# Allegro board Quadcopter.brd
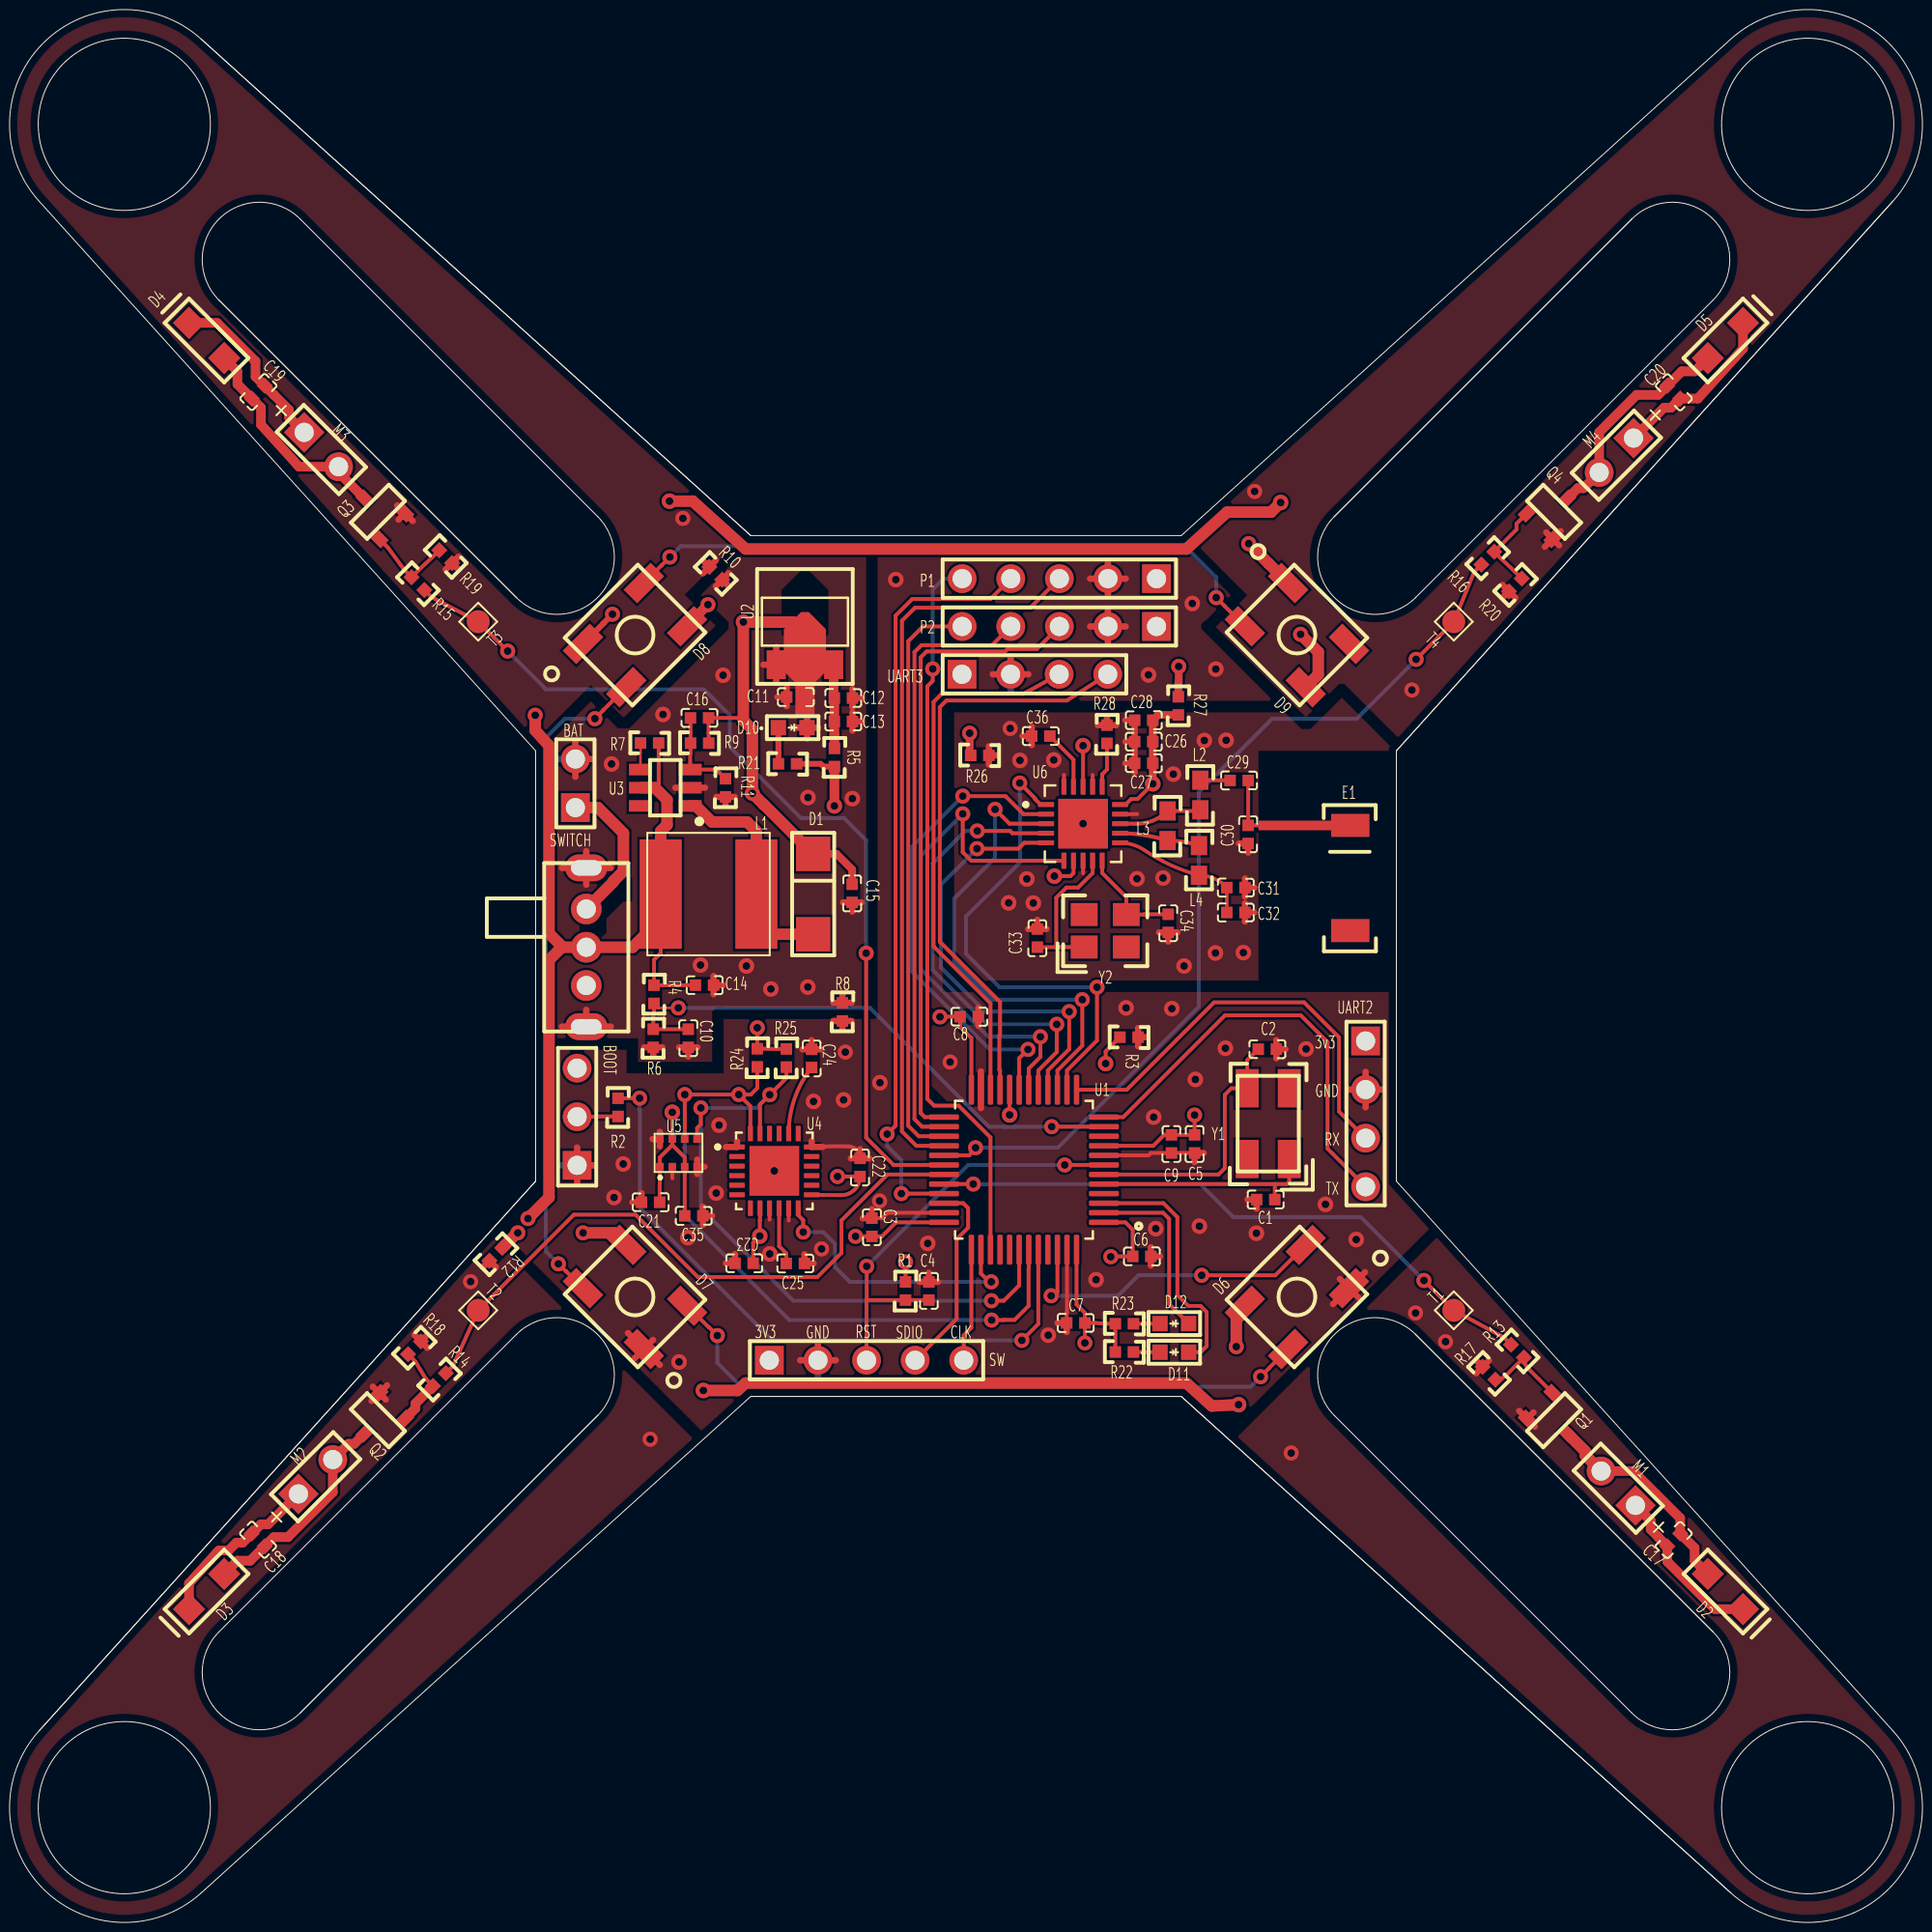
[diagram p0: board, top side]
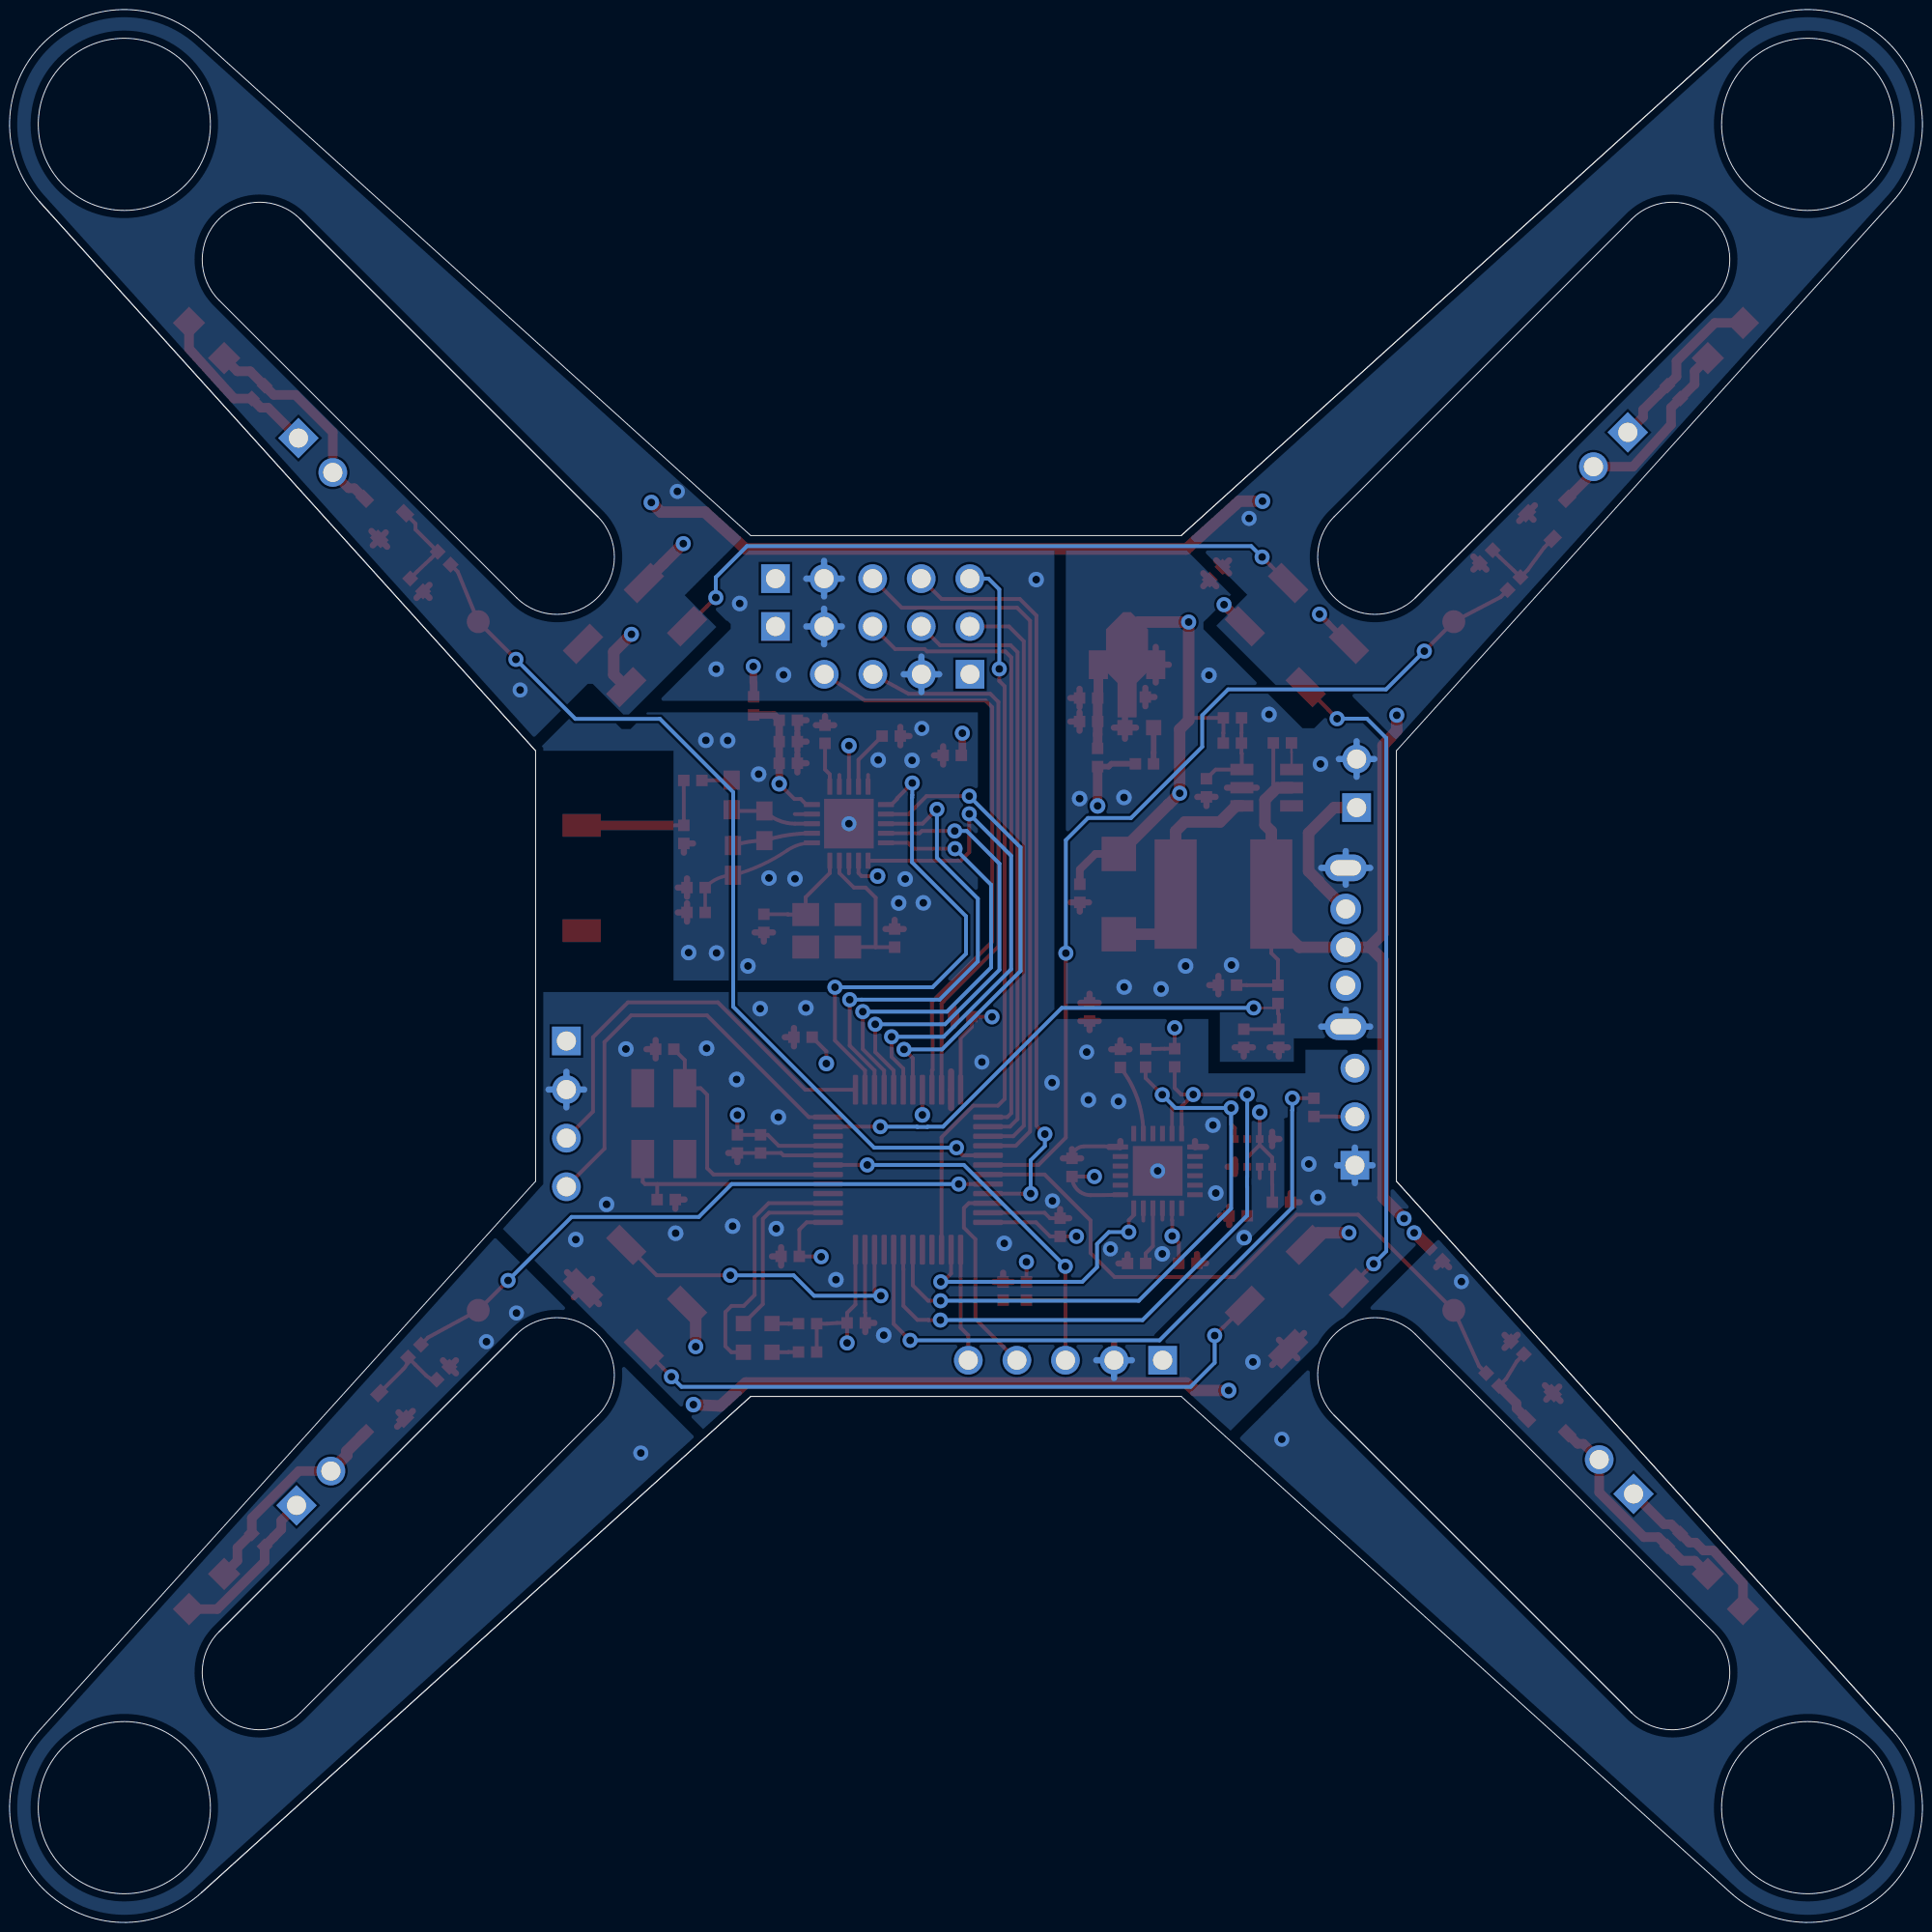
[diagram p1: board, bottom side, seen from below]

Outline 100 x 100 mm; copper layers: TOP, 2GND, 3POWER, BOTTOM. Coordinates in mm from the lower left corner of the outline.
Outline path: circle c6,94 r4.5 ; circle c6,6 r4.5 ; circle c94,94 r4.5 ; circle c94,6 r4.5 ; 10.02,98.45 arc(1.76,98.24) 1.55,89.98 27.5,61.25 ; 10.02,98.45 38.75,72.5 ; 10.02,98.45 38.75,72.5 ; 1.55,10.02 27.5,38.75 ; 1.55,10.02 arc(1.76,1.76) 10.02,1.55 38.75,27.5 ; 1.55,10.02 27.5,38.75 ; 27.5,38.75 27.5,61.25 ; 27.5,38.75 27.5,61.25 ; 38.75,72.5 61.25,72.5 89.98,98.45 arc(98.24,98.24) 98.45,89.98 ; 10.95,84.81 arc(10.95,89.05) 15.19,89.05 30.75,73.49 arc(30.75,69.25) 26.51,69.25 ; 10.95,84.81 26.51,69.25 ; 10.95,84.81 26.51,69.25 ; 15.19,10.95 arc(10.95,10.95) 10.95,15.19 26.51,30.75 arc(30.75,30.75) 30.75,26.51 ; 15.19,10.95 30.75,26.51 ; 15.19,10.95 30.75,26.51 ; 38.75,27.5 61.25,27.5 ; 38.75,27.5 61.25,27.5 ; 61.25,27.5 89.98,1.55 ; 61.25,27.5 89.98,1.55 ; 89.98,1.55 arc(98.24,1.76) 98.45,10.02 72.5,38.75 ; 69.25,73.49 84.81,89.05 ; 69.25,73.49 arc(69.25,69.25) 73.49,69.25 89.05,84.81 arc(89.05,89.05) 84.81,89.05 ; 69.25,73.49 84.81,89.05 ; 73.49,30.75 arc(69.25,30.75) 69.25,26.51 84.81,10.95 arc(89.05,10.95) 89.05,15.19 ; 73.49,30.75 89.05,15.19 ; 73.49,30.75 89.05,15.19 ; 72.5,61.25 72.5,38.75 ; 72.5,61.25 98.45,89.98 ; 72.5,61.25 72.5,38.75 ; 72.5,61.25 98.45,89.98

## Placement (name value [footprint] x y rotation side)
BAT  BAT  [HDR1X2]  29.58 59.55 90 top
BOOT  BOOT  [HDR1X3]  29.67 42.12 90 top
C1  20pF  [C0402]  65.67 37.79 0 top
C2  20pF  [C0402]  65.75 45.65 180 top
C3  0.1uF  [C0402]  45.08 36.34 270 top
C4  1uF  [C0402]  48.06 33.01 270 top
C5  1uF  [C0402]  61.95 40.7 90 top
C6  0.1uF  [C0402]  59.19 34.82 180 top
C7  0.1uF  [C0402]  55.74 31.34 0 top
C8  0.1uF  [C0402]  50.17 47.35 180 top
C9  0.1uF  [C0402]  60.74 40.7 90 top
C10  0.1uF  [C0402]  35.48 46.22 270 top
C11  1uF  [C0402]  41.1 64.06 180 top
C12  22uF  [C0402]  43.59 64.01 0 top
C13  0.1uF  [C0402]  43.59 62.78 0 top
C14  22uF  [C0402]  36.33 49 180 top
C15  22uF  [C0402]  44.05 53.8 90 top
C16  15pF  [C0402]  36.07 62.97 0 top
C17  4.7uF  [C0402]  87 20 45 top
C18  4.7uF  [C0402]  13 20 315 top
C19  4.7uF  [C0402]  13 80 225 top
C20  4.7uF  [C0402]  87 80 135 top
C21  0.1uF  [C0402]  33.51 37.65 180 top
C22  0.1uF  [C0402]  44.46 39.47 90 top
C23  10nF  [C0402]  38.4 34.46 180 top
C24  2.2nF  [C0402]  41.93 45.17 90 top
C25  0.1uF  [C0402]  41.08 34.45 0 top
C26  4.7uF  [C0402]  59.29 61.73 180 top
C27  0.1uF  [C0402]  59.29 60.6 180 top
C28  1nF  [C0402]  59.29 62.85 180 top
C29  1.5pF  [C0402]  64.28 59.7 0 top
C30  1pF  [C0402]  64.75 56.88 270 top
C31  2.2nF  [C0402]  64.11 54.1 0 top
C32  4.7pF  [C0402]  64.11 52.8 0 top
C33  10pF  [C0402]  53.73 51.46 90 top
C34  10pF  [C0402]  60.57 52.23 270 top
C35  0.1uF  [C0402]  35.77 36.94 0 top
C36  33nF  [C0402]  53.91 62.02 0 top
D1  SS14  [SMA]  42.01 53.76 270 top
D2  B5819WS  [SOD-323]  89.7 17.3 135 top
D3  B5819WS  [SOD-323]  10.3 17.3 45 top
D4  B5819WS  [SOD-323]  10.3 82.7 315 top
D5  B5819WS  [SOD-323]  89.7 82.7 225 top
D6  RGB  [5050]  67.3 32.7 45 top
D7  RGB  [5050]  32.7 32.7 315 top
D8  RGB  [5050]  32.7 67.3 225 top
D9  RGB  [5050]  67.3 67.3 135 top
D10  LED  [LED_0603]  40.94 62.46 0 top
D11  LED  [LED_0603]  60.89 29.81 0 top
D12  LED  [LED_0603]  60.89 31.3 0 top
E1  ANT_CA_C03  [ANT]  65.29 61.25 270 top
L1  1255AY-4R7M=P3/4.7uH_4A  [SMD6X6]  36.54 53.76 0 top
L2  3.9nH  [L_0603]  62.25 58.94 90 top
L3  8.2nH  [L_0603]  60.54 57.33 90 top
L4  2.7nH  [L_0603]  62.18 55.52 270 top
M1  M_720  [MOTOR]  84.1 22.7 135 top
M2  M_720  [MOTOR]  16 23.3 45 top
M3  M_720  [MOTOR]  16.3 77 315 top
M4  M_720  [MOTOR]  84 76.7 225 top
P1  Header_5P  [HDR1X5]  54.88 70.25 180 top
P2  Header_5P  [HDR1X5]  54.88 67.75 180 top
Q1  SI2302  [SOT-23-3]  80 27 225 top
Q2  SI2302  [SOT-23-3]  20 27 135 top
Q3  SI2302  [SOT-23-3]  20 73 45 top
Q4  SI2302  [SOT-23-3]  80 73 315 top
R1  10K  [R0402]  46.84 33.01 90 top
R2  10K  [R0402]  31.81 42.61 90 top
R3  10K  [R0402]  58.52 46.28 180 top
R4  100K,1%  [R0402]  33.69 48.52 270 top
R5  0R,1%  [R0402]  43.12 60.9 270 top
R6  100K,1%  [R0402]  33.65 46.22 270 top
R7  100K  [R0402]  33.46 61.66 180 top
R8  0R,1%  [R0402]  43.54 47.6 270 top
R9  73.2K,,1%  [R0402]  36.08 61.65 0 top
R10  0R,1%  [R0402]  36.92 70.53 135 top
R11  10K,1%  [R0402]  37.43 59.31 270 top
R12  0R,1%  [R0402]  25.42 34.93 225 top
R13  100R  [R0402]  78.83 29.87 315 top
R14  100R  [R0402]  22.47 28.38 225 top
R15  100R  [R0402]  21.35 69.99 135 top
R16  100R  [R0402]  77.28 71.32 45 top
R17  10K  [R0402]  77.34 28.71 135 top
R18  10K  [R0402]  21.17 30.04 45 top
R19  10K  [R0402]  22.8 71.4 315 top
R20  10K  [R0402]  78.72 69.92 225 top
R21  330  [R0402]  40.67 60.57 180 top
R22  330  [R0402]  58.28 29.82 0 top
R23  330  [R0402]  58.28 31.3 0 top
R24  4.7K  [R0402]  39.09 45.2 270 top
R25  4.7K  [R0402]  40.61 45.19 270 top
R26  0  [R0402]  50.72 61.01 0 top
R27  0  [R0402]  61.1 63.6 270 top
R28  22K  [R0402]  57.37 62.12 90 top
SW  SWD  [HDR1X5]  44.8 29.39 0 top
SWITCH  SK12D07VG3  [SWITCH]  30.15 50.98 270 top
T1  test  [TEST]  75.5 32 45 top
T2  test  [TEST]  24.5 32 315 top
T3  test  [TEST]  24.5 68 225 top
T4  test  [TEST]  75.5 68 135 top
U1  STM32F103C8T6  [QFP50P900X900X160-48N]  53.03 39.35 180 top
U2  HT7833  [SOT89]  41.58 67.75 0 top
U3  SX1308  [SOT23-6]  34.28 59.32 180 top
U4  MPU6050  [QFN50P400X400X90-24N]  39.98 39.29 0 top
U5  FBM320  [LGA-8]  34.97 40.23 90 top
U6  Si24R1  [QFN50P400X400X90-20N]  56.12 57.44 0 top
UART2  USART2  [HDR1X4]  70.89 42.29 270 top
UART3  USART3  [HDR1X4]  53.58 65.25 0 top
Y1  RH08000474_8M  [SMD5032_4P]  65.8 41.76 90 top
Y2  OSC_16M  [SMD3225_4P]  57.28 51.84 0 top

## Library data of the parts
BAT = 2P
BOOT = BOOT
C1-C36 = CAP NP
D1 = SS14
D2-D5 = B5819WS
D6-D9 = RGB
D10-D12 = LED
E1 = ANT
L1-L4 = INDUCTOR
M1-M4 = moter_0
P1 P2 = Header_5P
Q1-Q4 = SI2302
R1-R28 = R
SW = SWD
SWITCH = switch_3P
T1-T4 = test
U1 = STM32F103C8T6_2
U2 = HT7833_1
U3 = SX1308
U4 = MPU6050_0
U5 = FBM320
U6 = Si24R1
UART2 UART3 = USART
Y1 Y2 = OSC

## Footprints (pads in the part's own frame, mm; a bottom-side part is the same pattern mirrored in y, then rotated)
5050
  rect 2x1 smd: 1(2.25,-1.6) 2(2.25,1.6) 3(-2.25,1.6) 4(-2.25,-1.6)
ANT
  round 0.4 smd: 1(3.9,0.24)
C0402
  rect 0.6x0.6 smd: 1(-0.475,0) 2(0.475,0)
HDR1X2
  rect 1.5x1.5 hole 1: 1(-1.27,0)
  round 1.5 hole 1: 2(1.27,0)
HDR1X3
  rect 1.5x1.5 hole 1: 1(-2.54,0)
  round 1.5 hole 1: 2(0,0) 3(2.54,0)
HDR1X4
  rect 1.5x1.5 hole 1: 1(-3.79,0)
  round 1.5 hole 1: 2(-1.25,0) 3(1.29,0) 4(3.83,0)
HDR1X5
  rect 1.5x1.5 hole 1: 1(-5.08,0)
  round 1.5 hole 1: 2(-2.54,0) 3(0,0) 4(2.54,0) 5(5.08,0)
L_0603
  rect 1x0.85 smd: 1(-0.775,0) 2(0.775,0)
LED_0603
  rect 0.8x0.8 smd: 1(-0.75,0) 2(0.75,0)
LGA-8
  rect 0.4x0.4 smd: 1(0.725,0.975) 2(0.725,0.325) 3(0.725,-0.325) 4(0.725,-0.975) 5(-0.725,-0.975) 6(-0.725,-0.325) 7(-0.725,0.325) 8(-0.725,0.975)
MOTOR
  rect 1.5x1.5 hole 1: 1(-1.27,0)
  round 1.5 hole 1: 2(1.27,0)
QFN50P400X400X90-20N
  custom 0.84x0.26 smd: 1(-1.935,1) 2(-1.935,0.5) 3(-1.935,0) 4(-1.935,-0.5) 5(-1.935,-1) 11(1.935,-1) 12(1.935,-0.5) 13(1.935,0) 14(1.935,0.5) 15(1.935,1)
  custom 0.26x0.84 smd: 6(-1,-1.935) 7(-0.5,-1.935) 8(0,-1.935) 9(0.5,-1.935) 10(1,-1.935) 16(1,1.935) 17(0.5,1.935) 18(0,1.935) 19(-0.5,1.935) 20(-1,1.935)
  rect 2.6x2.6 smd: 21(0,0)
QFN50P400X400X90-24N
  custom 0.81x0.26 smd: 1(-1.95,1.25) 2(-1.95,0.75) 3(-1.95,0.25) 4(-1.95,-0.25) 5(-1.95,-0.75) 6(-1.95,-1.25) 13(1.95,-1.25) 14(1.95,-0.75) 15(1.95,-0.25) 16(1.95,0.25) 17(1.95,0.75) 18(1.95,1.25)
  custom 0.26x0.81 smd: 7(-1.25,-1.95) 8(-0.75,-1.95) 9(-0.25,-1.95) 10(0.25,-1.95) 11(0.75,-1.95) 12(1.25,-1.95) 19(1.25,1.95) 20(0.75,1.95) 21(0.25,1.95) 22(-0.25,1.95) 23(-0.75,1.95) 24(-1.25,1.95)
  rect 2.6x2.6 smd: 25(0,0)
QFP50P900X900X160-48N
  custom 1.56x0.28 smd: 1(-4.18,2.75) 2(-4.18,2.25) 3(-4.18,1.75) 4(-4.18,1.25) 5(-4.18,0.75) 6(-4.18,0.25) 7(-4.18,-0.25) 8(-4.18,-0.75) 9(-4.18,-1.25) 10(-4.18,-1.75) 11(-4.18,-2.25) 12(-4.18,-2.75) 25(4.18,-2.75) 26(4.18,-2.25) 27(4.18,-1.75) 28(4.18,-1.25) 29(4.18,-0.75) 30(4.18,-0.25) 31(4.18,0.25) 32(4.18,0.75) 33(4.18,1.25) 34(4.18,1.75) 35(4.18,2.25) 36(4.18,2.75)
  custom 0.28x1.56 smd: 13(-2.75,-4.18) 14(-2.25,-4.18) 15(-1.75,-4.18) 16(-1.25,-4.18) 17(-0.75,-4.18) 18(-0.25,-4.18) 19(0.25,-4.18) 20(0.75,-4.18) 21(1.25,-4.18) 22(1.75,-4.18) 23(2.25,-4.18) 24(2.75,-4.18) 37(2.75,4.18) 38(2.25,4.18) 39(1.75,4.18) 40(1.25,4.18) 41(0.75,4.18) 42(0.25,4.18) 43(-0.25,4.18) 44(-0.75,4.18) 45(-1.25,4.18) 46(-1.75,4.18) 47(-2.25,4.18) 48(-2.75,4.18)
R0402
  rect 0.6x0.6 smd: 1(-0.475,0) 2(0.475,0)
SMA
  rect 1.8x1.8 smd: 1(-2.1,0) 2(2.1,0)
SMD6X6
  rect 2.2x5.72 smd: 1(-2.5,0) 2(2.5,0)
SMD3225_4P
  rect 1.4x1.2 smd: 1(-1.1,-0.85) 2(1.1,-0.85) 3(1.1,0.85) 4(-1.1,0.85)
SMD5032_4P
  rect 2x1.2 smd: 1(-1.85,-1.1) 2(1.85,-1.1) 3(1.85,1.1) 4(-1.85,1.1)
SOD-323
  rect 1.2x1.2 smd: 1(-1.3,0) 2(1.3,0)
SOT23-6
  rect 1.2x0.6 smd: 1(-1.3,0.95) 2(-1.3,0) 3(-1.3,-0.95) 4(1.3,-0.95) 5(1.3,0) 6(1.3,0.95)
SOT89
  rect 1x1.5 smd: 1(-1.5,-2) 3(1.5,-2)
  custom 2.2x5.5 smd: 2(0,-2)
SOT-23-3
  rect 0.6x0.8 smd: 1(-0.95,0) 2(0.95,0) 3(0,2.02)
SWITCH
  round 1.6 hole 1: 1(-2,0) 2(0,0) 3(2,0)
  oval 1.4x2.2 hole 0.8x1.6: 4(4.15,0) 5(-4.15,0)
TEST
  round 1.2 smd: 1(0,0)

## Nets
AGND1: Q1.2(S) Q2.2(S) R12.2 R17.2 R18.2
AGND2: Q3.2(S) Q4.2(S) R10.2 R19.2 R20.2
DGND: BOOT.1 C1.1 C2.1 C3.1 C4.1 C5.1 C6.1 C7.1 C8.1 C9.1 C21.2 C22.2 C23.2 C24.2 C25.2 C35.2 D6.1(GND) D7.1(GND) D8.1(GND) D9.1(GND) P1.2 P2.2 R3.1 R8.2 R26.1 SW.2 U1.8(VSSA) U1.23(VSS#23) U1.35(VSS#35) U1.47(VSS#47) U4.1(CLKIN) U4.9(AD0) U4.11(FSYNC) U4.18(GND) U4.25(PAD) U5.1(GND1) U5.5(ADDR) U5.7(GND2) UART2.2 UART3.2
GND: BAT.2 C10.2 C11.2 C12.2 C13.2 C14.1 C15.1 D10.2 R6.2 R8.1 R10.1 R11.2 R12.1 SWITCH.4 SWITCH.5 U2.1(GND) U3.2(GND)
VBAT: C14.2 C17.1 C18.1 C19.1 C20.1 D2.1 D3.1 D4.1 D5.1 L1.1 M1.1 M2.1 M3.1 M4.1 R4.1 R7.1 SWITCH.2 U3.5(IN)
VBAT_DEV: C10.1 R4.2 R6.1 U1.11(PA1)
VBATIN: BAT.1 SWITCH.1
VCC3V3: BOOT.3 C3.2 C5.2 C6.2 C7.2 C8.2 C9.2 C21.1 C22.1 C23.1 C35.1 P1.1 P2.1 R1.2 R5.2 R21.1 R22.1 R23.1 R24.1 R25.1 R27.1 SW.1 U1.1(VBAT) U1.9(VDDA) U1.24(VDD1) U1.36(VDD2) U1.48(VDD3) U4.8(VLOGIC) U4.13(VDD) U5.2(CSB) U5.6(VDDIO) U5.8(VDD) UART2.1 UART3.1
VCC5V: C11.1 C15.2 C16.2 D1.1 D6.3(VCC) D7.3(VCC) D8.3(VCC) D9.3(VCC) R9.2 U2.2(IN)
BOOT0: R2.2 U1.44(BOOT0)
BOOT1: R3.2 U1.20(PB2)
INT: U1.38(PA15) U4.12(INT)
LED_BAT_LOW: D12.2 U1.2(PC13-TAMPER-RTC)
LED_RGB: D6.2(DI) U1.46(PB9)
LED_USER: D11.2 U1.3(PC14-OSC32_IN)
OSC_IN: C1.2 U1.5(PD0_OSC_IN) Y1.1
OSC_OUT: C2.2 U1.6(PD1_OSC_OUT) Y1.3
PA12: P1.4 U1.33(PA12)
PB3: P1.5 U1.39(PB3)
PB12: P2.3 U1.25(PB12)
PB13: P2.4 U1.26(PB13)
PB14: P2.5 U1.27(PB14)
PB15: P1.3 U1.28(PB15)
PWM1: R13.1 T1.1 U1.32(PA11)
PWM2: R14.1 T2.1 U1.31(PA10)
PWM3: R15.1 T3.1 U1.30(PA9)
PWM4: R16.1 T4.1 U1.29(PA8)
RF3V3: C26.1 C27.1 C28.1 R27.2 U6.7(VCC1) U6.15(VCC2) U6.18(VCC3)
RF_CE: U1.14(PA4) U6.1(CE)
RF_CSN: U1.19(PB1) U6.2(CSN)
RF_IRQ: U1.18(PB0) U6.6(IRQ)
RF_MISO: U1.16(PA6) U6.5(MISO)
RF_MOSI: U1.17(PA7) U6.4(MOSI)
RF_SCK: U1.15(PA5) U6.3(SCK)
RFGND: C26.2 C27.2 C28.2 C30.2 C31.2 C32.2 C33.2 C34.2 C36.1 R26.2 R28.2 U6.8(VSS1) U6.14(VSS2) U6.17(VSS3) U6.20(VSS4) U6.21(PAD)
RST: C4.2 R1.1 SW.3 U1.7(NRST)
SCL: R25.2 U1.42(PB6) U4.23(SCL) U5.4(SCL)
SDA: R24.2 U1.43(PB7) U4.24(SDA) U5.3(SDA)
SWCLK: SW.5 U1.37(PA14)
SWDIO: SW.4 U1.34(PA13)
USART2_RX: U1.13(PA3) UART2.3
USART2_TX: U1.12(PA2) UART2.4
USART3_RX: U1.22(PB11) UART3.3
USART3_TX: U1.21(PB10) UART3.4
N03876: BOOT.2 R2.1
N06551: R7.2 U3.4(EN)
N07087: D1.2 L1.2 U3.1(SW)
N07201: C16.1 R9.1 R11.1 U3.3(FB)
N08056: C12.1 C13.1 R5.1 U2.3(OUT)
N10193: Q1.1(G) R13.2 R17.1
N12066: D10.1 R21.2
N13204: D11.1 R22.2
N14590: C24.1 U4.20(CPOUT)
N14597: C25.1 U4.10(REGOUT)
N17425: C17.2 D2.2 M1.2 Q1.3(D)
N17724: Q2.1(G) R14.2 R18.1
N18193: Q3.1(G) R15.2 R19.1
N18558: Q4.1(G) R16.2 R20.1
N31030: C33.1 U6.9(XC2) Y2.1
N31048: C34.1 U6.10(XC1) Y2.3
N31678: L2.1 L3.2 U6.13(ANT2)
N31682: L3.1 L4.1 U6.12(ANT1)
N31733: C31.1 C32.1 L4.2 U6.11(VDD_PA)
N32120: C29.1 L2.2
N32150: C29.2 C30.1 E1.1
N42163: C18.2 D3.2 M2.2 Q2.3(D)
N42183: C19.2 D4.2 M3.2 Q3.3(D)
N42205: C20.2 D5.2 M4.2 Q4.3(D)
N44538: D12.1 R23.2
N45703: D7.4(DO) D8.2(DI)
N45721: D6.4(DO) D7.2(DI)
N45733: D8.4(DO) D9.2(DI)
N128503: C36.2 U6.19(DVDD)
N3065515: R28.1 U6.16(IREF)

Pads without a net: D9 4; SWITCH 3; U1 4 10 40 41 45; U3 6; U4 2 3 4 5 6 7 14 15 16 17 19 21 22; Y1 2 4; Y2 2 4

## Via types
v1: diameter 0.787, hole 0.406, TOP to BOTTOM, 79 vias
v2: diameter 0.813, hole 0.406, TOP to BOTTOM, 62 vias

## Routing (per net, layer and track width the routed paths; a pad name or vN(x,y) marks a point on that pad's centre or on a via; arc(x,y) is an arc through that point)
AGND1: length 43.6
  TOP w0.327: 76.67,28.71 R17.2 ; R17.2 76.67,29.38 ; R17.2 77.34,29.38 ; Q2.2 19.67,27.33 ; Q2.2 19.74,28.08 ; Q2.2 18.99,28.01 ; Q2.2 18.92,27.26 ; 78.92,26.74 Q1.2 ; Q1.2 79.67,26.67 ; Q1.2 79.74,25.92 ; 25.42,34.26 R12.2 24.75,34.26 ; 21.17,30.71 R18.2 ; R18.2 21.84,30.71 ; R18.2 21.84,30.04
  2GND w0.6: v1(67,24.54) 65.57,24.54 61.52,28.2 38.48,28.2 35.23,25.26 v1(33.49,25.26)
  vias: v1(24.1,33.5) v1(73.5,31.86) v1(75.07,30.36)
AGND2: length 39.8
  TOP w0.327: 20.26,74.08 Q3.2 ; Q3.2 21.08,73.26 ; Q3.2 20.33,73.33 ; 80.26,71.92 Q4.2 ; Q4.2 81.08,72.74 ; Q4.2 80.33,72.67 ; Q4.2 81.01,71.99 ; R10.2 36.92,71.2 ; R10.2 36.25,71.2 ; R10.2 36.25,70.53 ; R19.2 23.47,71.4 ; R19.2 22.8,70.73 ; R19.2 23.47,70.73 ; 78.05,69.92 R20.2 ; R20.2 78.72,69.25 ; R20.2 78.05,69.25
  2GND w0.6: v1(35.2,73.4) 36.71,73.4 38.48,71.8 62.08,71.8 v1(65.09,74.81)
  vias: v1(73.31,64.43)
DGND: length 137.2
  TOP w0.2: C5.1 C9.1 59.67,40.23 59.54,40.1 U1.8 ; 34.64,39.51 34.64,38.91 ; U4.9 39.73,36.74 ; U1.35 45.89,37.1 45.61,36.81 C3.1 ; U1.47 55.28,31.88 55.27,31.87 55.27,31.34 ; 40.73,36.69 U4.11 ; C22.2 arc(44.28,40.38) 43.85,40.57 arc(42.89,40.57) U4.18
  TOP w0.3: v1(31.52,68.39) 31.04,67.91 31.04,67.9 D8.1
  TOP w0.327: 38.03,40.85 U4.1 37.45,40.54 ; 51.4,65.25 UART3.2 ; UART3.2 52.33,66.18 ; UART3.2 53.26,65.25 ; D6.1 70.86,33.99 ; D6.1 70.5,32.68 ; D6.1 69.54,33.64 ; D6.1 69.19,32.33 ; 32.68,29.5 D7.1 ; D7.1 33.99,29.14 ; D7.1 33.64,30.46 ; D7.1 32.33,30.81 ; P2.2 58.35,67.75 ; P2.2 57.42,66.82 ; P2.2 57.42,68.68 ; P2.2 56.49,67.75 ; 43.06,47.12 R8.2 ; R8.2 43.54,46.65 ; R8.2 44.02,47.12 ; 48.06,33.48 48.06,33.96 ; 48.06,33.48 48.54,33.48 ; 48.06,33.48 47.58,33.48 ; 65.2,37.31 C1.1 64.72,37.79 ; UART2.2 70.89,44.47 ; UART2.2 71.82,43.54 ; UART2.2 70.89,42.61 ; UART2.2 69.96,43.54 ; 50.78,42.57 U1.23 50.78,44.49 ; 41.33,29.39 SW.2 ; SW.2 42.26,30.32 ; SW.2 43.19,29.39 ; C6.1 59.66,35.3 ; C6.1 59.66,34.34 ; C6.1 60.14,34.82 ; BOOT.1 30.6,39.58 ; BOOT.1 29.67,38.65 ; BOOT.1 29.67,40.51 ; 61.95,39.75 C5.1 62.43,40.23 ; 41.45,45.64 C24.2 ; C24.2 41.93,46.12 ; C24.2 42.41,45.64 ; 42.03,34.45 C25.2 41.55,34.93 ; C35.2 36.24,37.42 ; C35.2 36.24,36.46 ; C35.2 36.72,36.94 ; R3.1 59.47,46.28 ; R3.1 58.99,46.76 ; R3.1 58.99,45.8 ; 37.92,34.94 C23.2 37.45,34.46 ; C22.2 44.94,39.95 ; C22.2 43.98,39.95 ; C22.2 44.46,40.42 ; 66.22,45.17 C2.1 ; C2.1 66.22,46.13 ; C2.1 66.7,45.65 ; P1.2 57.42,71.18 ; P1.2 58.35,70.25 ; P1.2 56.49,70.25 ; P1.2 57.42,69.32 ; 35.95,39.13 U5.5 ; U5.5 36.32,39.51 ; U5.5 35.95,39.88 ; 45.08,37.29 C3.1 44.6,36.81 ; 33.62,40.95 U5.1 ; U5.1 34,40.58 ; U5.1 34,41.33 ; 50.65,46.87 C8.1 50.65,47.83 ; 33.04,38.13 C21.2 32.56,37.65 ; 41.93,40.85 U4.18 42.51,40.54 ; 55.27,30.86 55.27,31.34 54.79,31.34
  TOP w0.4: R26.1 50.19,61.06 v1(50.19,62.17)
  TOP w0.6: v1(64.78,72.08) 65.83,71.03 65.83,71.03 D9.1
  2GND w0.3: 45.71,71.2 36.84,71.2 34.03,68.39 v1(31.52,68.39) ; 62.81,70.11 62.8,70.11 62.8,70.09
  2GND w0.327: 56.49,67.75 P2.2 ; P2.2 57.42,66.82 ; P2.2 58.35,67.75 ; P2.2 57.42,68.68 ; 70.89,42.61 UART2.2 ; UART2.2 70.89,44.47 ; UART2.2 71.82,43.54 ; UART2.2 69.96,43.54 ; 52.33,64.32 UART3.2 ; UART3.2 51.4,65.25 ; UART3.2 53.26,65.25 ; UART3.2 52.33,66.18 ; 56.49,70.25 P1.2 ; P1.2 57.42,69.32 ; P1.2 58.35,70.25 ; P1.2 57.42,71.18 ; BOOT.1 30.6,39.58 ; BOOT.1 29.67,40.51 ; BOOT.1 29.67,38.65 ; SW.2 43.19,29.39 ; SW.2 42.26,30.32 ; SW.2 41.33,29.39
  2GND w0.4: 48.45,62.17 v1(50.19,62.17)
  2GND w0.6: 62.81,70.11 v1(64.78,72.08)
  BOTTOM w0.327: SW.2 43.19,29.39 ; SW.2 42.26,28.46 ; SW.2 41.33,29.39 ; BOOT.1 29.67,40.51 ; BOOT.1 30.6,39.58 ; BOOT.1 28.74,39.58 ; BOOT.1 29.67,38.65 ; P1.2 58.35,70.25 ; P1.2 56.49,70.25 ; P1.2 57.42,71.18 ; P1.2 57.42,69.32 ; P2.2 58.35,67.75 ; P2.2 57.42,66.82 ; P2.2 56.49,67.75 ; P2.2 57.42,68.68 ; 52.33,64.32 UART3.2 ; UART3.2 51.4,65.25 ; UART3.2 53.26,65.25 ; UART3.2 52.33,66.18 ; 69.96,43.54 UART2.2 ; UART2.2 70.89,44.47 ; UART2.2 70.89,42.61 ; UART2.2 71.82,43.54
  vias: v1(39.98,39.29) v1(42.45,35.21) v1(43.69,45.5) v1(45.48,37.72) v1(49.17,44.98) v2(31.6,37.9) v2(32.08,39.65) v2(35,29.3) v2(35.46,35.8) v2(36.94,38.13) v2(37.09,41.68) v2(39.74,34.95) v2(42.03,42.92) v2(43.6,43) v2(45.5,43.9) v2(46.33,70.2) v2(48,35.5) v2(54.3,30.7) v2(56.8,33.6) v2(58.37,47.81) v2(59.54,65.22) v2(59.81,42.1) v2(59.92,36.27) v2(60.76,47.77) v2(61.83,68.95) v2(61.99,44.07) v2(62.2,36.4) v2(63.06,65.52) v2(63.56,45.7) v2(65.18,36.03) v2(67.78,45.66) v2(68.79,37.54) v2(70.4,35.7)
GND: length 67.8
  TOP w0.327: 36.36,59.32 U3.2 34.8,59.32 ; 43.57,53.33 C15.1 ; C15.1 44.53,53.33 ; C15.1 44.05,52.85 ; SWITCH.4 31.43,46.83 ; SWITCH.4 28.87,46.83 ; SWITCH.4 30.15,47.71 ; 41.69,61.88 D10.2 ; D10.2 41.69,63.04 ; D10.2 42.27,62.46 ; D10.2 41.11,62.46 ; 36.8,48.52 C14.1 ; C14.1 36.8,49.48 ; C14.1 37.28,49 ; 36.95,58.84 R11.2 ; R11.2 37.43,58.36 ; R11.2 37.91,58.84 ; C13.2 44.54,62.78 ; C13.2 44.06,63.26 ; C13.2 44.06,62.3 ; 35.48,45.27 C10.2 ; C10.2 35,45.74 ; C10.2 35.96,45.74 ; C11.2 40.62,64.54 ; C11.2 40.15,64.06 ; C11.2 40.62,63.58 ; BAT.2 29.58,61.75 ; BAT.2 30.51,60.82 ; BAT.2 29.58,59.89 ; 39.4,65.75 U2.1 ; U2.1 40.08,64.82 ; U2.1 40.76,65.75 ; U2.1 40.08,66.68 ; R10.1 37.59,70.53 ; R10.1 37.59,69.86 ; R10.1 36.92,69.86 ; 33.17,45.74 R6.2 ; R6.2 33.65,45.27 ; R6.2 34.13,45.74 ; 44.06,63.53 C12.2 ; C12.2 44.54,64.01 ; C12.2 44.06,64.49 ; 30.15,54.25 SWITCH.5 ; SWITCH.5 31.43,55.13 ; SWITCH.5 28.87,55.13 ; SWITCH.5 30.15,56.01 ; 43.06,48.08 R8.1 ; R8.1 44.02,48.08 ; R8.1 43.54,48.55
  TOP w0.6: v1(26.57,36.05) 26.54,36.05 R12.1
  2GND w0.327: BAT.2 29.58,61.75 ; BAT.2 30.51,60.82 ; BAT.2 28.65,60.82 ; BAT.2 29.58,59.89 ; 28.87,55.13 SWITCH.5 ; SWITCH.5 31.43,55.13 ; SWITCH.5 30.15,54.25 ; SWITCH.5 30.15,56.01 ; 31.43,46.83 SWITCH.4 30.15,47.71
  2GND w0.6: SWITCH.4 29.75,46.83 28.2,45.28 28.2,38.48 27.92,38.17 27.92,37.14 27.92,36.46 27.44,35.98 26.76,35.98 26.69,36.05 v1(26.57,36.05)
  BOTTOM w0.327: BAT.2 29.58,61.75 ; BAT.2 30.51,60.82 ; BAT.2 28.65,60.82 ; BAT.2 29.58,59.89 ; 30.15,54.25 SWITCH.5 ; SWITCH.5 30.15,56.01 ; SWITCH.5 28.87,55.13 ; SWITCH.5 31.43,55.13 ; SWITCH.4 30.15,47.71 ; SWITCH.4 31.43,46.83 ; SWITCH.4 28.87,46.83
  vias: v2(31.47,60.56) v2(34.16,63.15) v2(36.12,50.05) v2(37.3,65.2) v2(38.52,50) v2(39.8,48.8) v2(41.74,58.81) v2(41.73,48.9) v2(44.06,58.75)
VBAT: length 162.9
  TOP w0.2: 33.73,59.32 33.94,59.52 33.94,61.66 ; C14.2 35.33,49 35.32,48.99 R4.1 33.69,50.32 34.04,50.67 34.04,52.45
  TOP w0.5: D4.1 10.85,83.62 12.86,81.62 12.86,80.81 C19.1 13.81,79.86 13.82,79.86 14.61,79.07 14.61,78.69 M3.1 ; M4.1 86.49,79.19 86.86,79.19 C20.1 88.26,79.66 90.62,82.28 D5.1 ; M1.1 85.79,21.01 85.79,20.55 86.19,20.15 86.19,20.14 C17.1 86.66,18.86 89.15,16.38 D2.1 ; D3.1 9.38,17.72 10.85,19.35 10.94,19.44 11.44,19.44 11.86,19.86 12.19,19.86 C18.1 13.14,20.81 13.51,20.81 M2.1
  TOP w0.6: v2(64.25,27.07) 62.85,27 61.52,28.2 38.48,28.2 38.05,27.81 v2(36.27,27.81) ; 28.92,50.98 28.87,50.98 28.2,50.31 28.2,37.9 v1(27.1,36.8) ; 28.92,50.98 28.2,51.7 28.2,61.52 27.48,62.32 v1(27.48,63.11) ; 28.92,50.98 SWITCH.2 32.57,50.98 34.04,52.45 L1.1 34.04,57.05 34.37,57.38 34.37,58.69 33.73,59.32 U3.5 ; v2(66.45,74.23) 65.95,73.73 63.66,73.73 61.52,71.8 38.48,71.8 35.97,74.07 35.71,74.3 v2(34.5,74.3)
  3POWER w0.2: 34.4,74.2 v2(34.5,74.3)
  3POWER w0.327: M3.1 16.06,78.55 ; M3.1 16.06,77.24 ; M3.1 14.75,77.24 ; M3.1 14.75,78.55 ; M1.1 85.65,21.15 ; M1.1 84.34,21.15 ; M1.1 84.34,22.46 ; M1.1 85.65,22.46 ; 14.45,21.75 M2.1 ; M2.1 14.45,23.06 ; M2.1 15.76,21.75 ; M2.1 15.76,23.06 ; M4.1 85.55,76.94 ; M4.1 85.55,78.25 ; M4.1 84.24,76.94 ; M4.1 84.24,78.25
VBAT_DEV: length 29.4
  TOP w0.127: R4.2 33.92,47.81 v1(34.96,47.81)
  TOP w0.2: v1(54.48,41.6) U1.11 ; C10.1 R6.1 33.65,47.48 33.69,47.52 R4.2
  BOTTOM w0.2: v1(54.48,41.6) 52.56,41.6 52.54,41.58 52.02,41.58 52,41.6 51.2,41.6 44.99,47.81 v1(34.96,47.81)
VBATIN: length 7.8
  TOP w0.6: BAT.1 30.76,58.28 32.09,56.95 32.09,54.96 31.56,54.43 31.56,54.39 SWITCH.1
VCC3V3: length 73.5
  TOP w0.2: R25.1 40.08,45.66 39.62,45.67 R24.1 v1(39.09,46.77) ; C7.2 56.74,31.34 57.28,31.3 R23.1 R22.1 ; C7.2 v1(56.22,30.3) ; C7.2 56.22,31.87 55.78,32.3 U1.48 ; 33.98,37.65 33.98,38.58 34,38.59 U5.8 34,39.99 34.64,40.64 ; v1(48.64,47.34) 48.65,47.35 C8.2 49.7,46.82 50.28,46.24 U1.24 ; v1(57.57,34.8) 57.59,34.82 C6.2 58.72,36.22 58.33,36.6 U1.1 ; U4.8 39.23,36.71 39.22,36.7 v2(39.22,35.88) 38.88,35.53 C23.1 ; U1.36 46.34,36.6 45.61,35.87 C3.2 v1(44.23,35.87) ; v1(43.28,38.99) C22.1 arc(44.18,38.31) 43.49,38.02 arc(42.71,38.02) U4.13 ; 34.64,40.64 v2(34.64,42.36) ; 34.64,40.64 35.3,39.99 U5.6 C35.1 ; U1.9 59.79,40.6 60.36,41.17 61.95,41.17 v1(61.95,42.21) ; 46.84,33.48 v1(46.84,34.53)
  TOP w0.3: R21.1 42.4,60.57 42.54,60.42 R5.2
  TOP w0.4: v1(61.12,65.66) 61.12,64.83 61.1,64.81 R27.1
  TOP w0.5: R5.2 v2(43.12,58.37)
  3POWER w0.327: SW.1 39.72,30.32 ; SW.1 40.65,29.39 ; SW.1 38.79,29.39 ; 70.89,45.15 UART2.1 ; UART2.1 71.82,46.08 ; UART2.1 69.96,46.08 ; UART2.1 70.89,47.01 ; P2.1 60.89,67.75 ; P2.1 59.96,68.68 ; P2.1 59.96,66.82 ; P2.1 59.03,67.75 ; 49.79,64.32 UART3.1 ; UART3.1 49.79,66.18 ; UART3.1 50.72,65.25 ; BOOT.3 30.6,44.66 ; BOOT.3 29.67,43.73 ; BOOT.3 29.67,45.59 ; P1.1 60.89,70.25 ; P1.1 59.96,69.32 ; P1.1 59.03,70.25 ; P1.1 59.96,71.18
VCC5V: length 143.4
  TOP w0.2: 38.36,62.84 38.23,62.97 C16.2 36.55,62.18 36.55,62.18 R9.2
  TOP w0.3: C11.1 41.58,64.72 41.58,64.72 U2.2
  TOP w0.4: D1.1 43.24,55.86 44.05,55.05 44.05,54.27
  TOP w0.5: D8.3 35.42,67.8 v1(36.51,68.89)
  TOP w0.6: v1(29.98,36.05) 31.61,36.05 D7.3 ; D6.3 64.13,31.79 v1(64.13,30.1) ; v1(36.51,68.89) 36.51,68.85 ; v1(67.49,67.34) 68.42,66.41 68.42,65.23 D9.3 ; D1.1 39.42,58.45 39.41,58.45 v1(38.83,59.03) 38.83,62.37 38.36,62.84 v1(38.36,67.98) 40.98,67.98 41.58,67.38 U2.2
  2GND w0.6: v1(36.51,68.89) 37.45,68.89 v1(38.36,67.98)
  3POWER w0.6: v1(64.13,30.1) 62.23,28.2 37.83,28.2 v1(29.98,36.05) 28.2,37.83 28.2,55.5 29,56.3 31.3,56.3 32.4,57.4 38.02,57.4 38.83,58.21 v1(38.83,59.03) ; v1(38.36,67.98) 38.36,69.76 40.4,71.8 63.03,71.8 v1(67.49,67.34)
BOOT0: length 34.8
  TOP w0.2: v1(52.92,30.43) 53.78,31.29 U1.44 ; R2.2 31.82,43.09 v1(32.94,43.09)
  BOTTOM w0.2: v1(52.92,30.43) 39.88,30.43 32.95,37.36 32.95,42.46 32.94,42.47 v1(32.94,43.09)
BOOT1: length 9.7
  TOP w0.2: R3.2 57.3,45.53 v2(57.3,44.9) ; U1.20 v2(52.28,42.22)
  3POWER w0.2: v2(52.28,42.22) 54.22,42.22 54.22,42.22 55.52,42.22 57.3,44 v2(57.3,44.9)
INT: length 14.9
  TOP w0.2: U4.12 41.23,36.97 41.49,36.71 v1(41.49,36.09) ; v1(51.32,33.49) 51.21,33.49 50.78,33.92 U1.38
  BOTTOM w0.2: v1(51.32,33.49) 43.92,33.49 43.15,34.26 43.15,35.47 42.53,36.09 v1(41.49,36.09)
LED_BAT_LOW: length 9.4
  TOP w0.2: U1.2 60.3,37.1 60.62,36.78 60.62,32.32 D12.2
LED_RGB: length 17
  TOP w0.2: v1(62.32,33.83) 66.17,33.83 D6.2 ; U1.46 54.78,32.96 54.58,32.76 v1(54.45,32.76)
  BOTTOM w0.2: v1(54.45,32.76) 57.94,32.76 59.01,33.83 v1(62.32,33.83)
LED_USER: length 13
  TOP w0.2: U1.3 60.32,37.6 61.05,36.87 61.05,32.8 61.62,32.23 62.26,32.23 62.58,31.91 62.58,30.12 62.27,29.81 D11.2
OSC_IN: length 11.7
  TOP w0.2: Y1.1 66.9,38.72 66.78,38.6 66.14,38.6 ; 66.14,38.6 U1.5 ; 66.14,38.6 66.14,38.59 C1.2
OSC_OUT: length 13.9
  TOP w0.2: U1.6 63.2,39.1 63.53,39.43 63.53,43.27 63.87,43.61 Y1.3 64.7,45.08 C2.2
PA12: length 39.8
  TOP w0.2: P1.4 51.28,69.19 47.19,69.19 46.32,68.32 46.32,41.66 v1(45.88,41.21) ; U1.33 47.02,38.1 47.01,38.09 46.63,38.09 v1(46.62,38.1)
  BOTTOM w0.2: v1(45.88,41.21) 45.88,40.59 46.62,39.84 v1(46.62,38.1)
PB3: length 38.5
  TOP w0.2: U1.39 51.28,41.04 49.62,42.7 48.33,42.7 47.98,43.05 47.98,64.62 48.26,64.9 v1(48.26,65.53)
  BOTTOM w0.2: v1(48.26,65.53) 48.26,69.69 48.82,70.25 P1.5
PB12: length 33
  TOP w0.2: P2.3 53.7,66.57 52.17,66.57 52.04,66.44 47.94,66.44 47.63,66.13 47.63,42.31 47.84,42.1 U1.25
PB13: length 31.7
  TOP w0.2: P2.4 51.36,66.77 47.67,66.77 47.31,66.41 47.31,41.99 47.7,41.6 U1.26
PB14: length 30.6
  TOP w0.2: U1.27 47.53,41.1 46.98,41.65 46.98,66.98 47.75,67.75 P2.5
PB15: length 38.4
  TOP w0.2: U1.28 47.4,40.6 46.65,41.35 46.65,68.05 47.33,68.73 53.36,68.73 P1.3
PWM1: length 32.9
  TOP w0.2: v1(50.38,38.6) U1.32 ; R13.1 78.12,30.58 T1.1 v1(73.94,33.56)
  BOTTOM w0.2: v1(50.38,38.6) 62.25,38.6 63.97,36.88 70.62,36.88 v1(73.94,33.56)
PWM2: length 34.7
  TOP w0.2: R14.1 23.18,29.09 T2.1 29.5,37 32.72,37 35.98,33.74 42.23,33.74 43.49,35 43.49,36.7 45.89,39.1 U1.31
PWM3: length 49.5
  TOP w0.2: R15.1 22.06,69.28 T3.1 v1(26.04,66.46) ; v1(44.78,50.67) 44.78,41.03 46.21,39.6 U1.30
  BOTTOM w0.2: v1(44.78,50.67) 44.78,56.58 43.62,57.74 41.37,57.74 37.65,61.46 37.65,63.11 36.3,64.46 28.04,64.46 v1(26.04,66.46)
PWM4: length 48.2
  TOP w0.2: v1(73.53,66.03) T4.1 76.57,70.61 R16.1 ; v1(50.5,40.5) 50.5,40.44 50.16,40.1 U1.29
  BOTTOM w0.2: v1(50.5,40.5) 54.8,40.5 62.17,47.87 62.17,59.09 66,62.92 70.42,62.92 v1(73.53,66.03)
RF3V3: length 10.8
  TOP w0.2: U6.18 v2(56.12,61.52) ; v2(59.77,59.52) 58.97,58.73 58.64,58.73 58.34,58.44 U6.15 ; 55.62,55.51 55.62,54.86 55.46,54.7 v2(54.62,54.7)
  TOP w0.4: R27.2 60.04,63.12 C28.1 C26.1 C27.1 v2(59.77,59.52)
RF_CE: length 25.6
  TOP w0.2: v1(56.85,48.89) 56.85,46.11 55.28,44.54 U1.14 ; 54.19,58.44 53.9,58.44 53.6,58.73 53.6,58.77 v1(52.81,59.56)
  BOTTOM w0.2: v1(56.85,48.89) 51.75,48.89 50,50.64 50,52.6 52.82,55.42 52.82,58.8 52.81,58.81 52.81,58.94 52.81,58.94 v1(52.81,59.56)
RF_CSN: length 25.1
  TOP w0.2: 54.19,57.94 53.01,57.94 52.07,58.88 v1(49.83,58.88) ; U1.19 52.78,45.18 v1(53.24,45.64)
  BOTTOM w0.2: v1(53.24,45.64) 51.25,45.64 47.15,49.74 47.15,56.2 v1(49.83,58.88)
RF_IRQ: length 27.2
  TOP w0.2: 55.12,55.51 52.37,55.51 52.37,55.5 51.85,55.5 51.85,55.51 50.27,55.51 49.83,55.95 v1(49.83,57.95) ; v1(53.89,46.3) 53.89,45.25 53.28,44.64 U1.18
  BOTTOM w0.2: v1(49.83,57.95) 47.64,55.76 47.64,49.83 51.17,46.3 v1(53.89,46.3)
RF_MISO: length 22.9
  TOP w0.2: U1.16 54.28,44.54 55.4,45.65 v1(55.4,47.61) ; v1(50.58,56.13) 52.74,56.13 53.04,56.44 54.19,56.44
  BOTTOM w0.2: v1(50.58,56.13) 48.69,54.25 48.69,49.92 51,47.61 v1(55.4,47.61)
RF_MOSI: length 23.7
  TOP w0.2: v1(54.74,46.95) 54.74,45.5 53.78,44.54 U1.17 ; v1(50.59,57.06) 52.31,57.06 52.43,56.94 54.19,56.94
  BOTTOM w0.2: v1(50.59,57.06) 49.96,57.06 48.25,55.35 48.25,49.8 51.1,46.95 v1(54.74,46.95)
RF_SCK: length 24.6
  TOP w0.2: 54.19,57.44 52.27,57.44 v1(51.52,58.19) ; U1.15 54.78,44.54 56.08,45.84 v1(56.08,48.24)
  BOTTOM w0.2: v1(51.52,58.19) 51.52,55.66 49.38,53.52 49.38,50.24 51.38,48.24 55.45,48.24 v1(56.08,48.24)
RFGND: length 17.6
  TOP w0.2: 56.12,55.51 56.12,54.84 ; U6.20 55.12,59.99 ; U6.14 58.95,57.94 ; 56.62,59.99 U6.17
  TOP w0.327: 58.34,60.6 C27.2 ; C27.2 58.81,61.08 ; C27.2 58.81,60.12 ; 60.57,51.28 C34.2 ; C34.2 61.05,51.76 ; C34.2 60.09,51.76 ; 64.27,56.41 C30.2 64.75,55.93 ; C31.2 65.06,54.1 ; C31.2 64.59,53.62 ; C31.2 64.59,54.58 ; C32.2 65.06,52.8 ; C32.2 64.59,52.32 ; C32.2 64.59,53.28 ; C33.2 53.73,52.41 ; C33.2 53.25,51.94 ; C33.2 54.21,51.94 ; 51.2,61.01 51.67,61.01 ; 51.2,61.01 51.2,61.49 ; 51.2,61.01 51.2,60.53 ; 56.89,62.59 R28.2 ; R28.2 57.37,63.07 ; R28.2 57.85,62.59 ; 58.81,61.25 C26.2 ; C26.2 58.34,61.73 ; C26.2 58.81,62.21 ; 58.81,62.37 C28.2 58.34,62.85 ; C36.1 53.44,62.5 ; C36.1 52.96,62.02 ; C36.1 53.44,61.54
  vias: v1(52.31,62.42) v1(56.12,57.44) v2(52.23,53.3) v2(52.82,60.75) v2(53.18,54.55) v2(53.52,53.29) v2(54.59,60.77) v2(58.94,54.56) v2(60.3,54.6) v2(60.84,60.03) v2(61.4,50) v2(62.46,61.79) v2(63.04,50.68) v2(63.6,61.8) v2(64.5,50.7)
RST: length 22.8
  TOP w0.2: U1.7 v1(55.16,39.6) ; 44.81,32.54 44.8,32.54 SW.3 ; 44.81,32.54 v1(44.81,34.3) ; 44.81,32.54 R1.1 C4.2
  BOTTOM w0.2: v1(44.81,34.3) 50.11,39.6 v1(55.16,39.6)
SCL: length 35.7
  TOP w0.2: R25.2 40.61,44.14 v1(39.74,43.27) 39.23,42.76 U4.23 ; U1.42 52.78,33.3 51.98,32.5 v1(51.33,32.5) ; v1(36.14,42.58) 36.14,41.73 35.95,41.53 U5.4
  BOTTOM w0.2: v1(39.74,43.27) 39.05,42.58 v1(36.14,42.58) 36.14,37.33 40.97,32.5 v1(51.33,32.5)
SDA: length 39.5
  TOP w0.2: 39.09,44.73 39.09,43.62 38.75,43.28 v1(38.12,43.28) ; v1(51.34,31.49) 51.97,31.49 51.98,31.5 52.54,31.5 53.27,32.23 53.27,34.15 53.28,34.16 U1.43 ; U5.3 35.3,40.96 v1(35.3,43.28) v1(38.12,43.28) ; U4.24 38.73,42.67 v1(38.12,43.28)
  BOTTOM w0.2: v1(35.3,43.28) 35.3,38.99 35.31,38.98 35.31,38.46 35.3,38.45 35.3,36.96 40.77,31.49 v1(51.34,31.49)
SWCLK: length 5.9
  TOP w0.2: SW.5 49.88,30.69 50.28,31.09 U1.37
SWDIO: length 10.5
  TOP w0.2: SW.4 49.51,31.55 49.51,35.72 50.11,36.32 50.11,37.35 49.86,37.6 U1.34
USART2_RX: length 22.2
  TOP w0.2: U1.13 58.4,43.53 62.97,48.1 67.67,48.1 69.5,46.27 69.5,42.39 UART2.3
USART2_TX: length 22.9
  TOP w0.2: UART2.4 68.9,40.45 68.9,46.02 67.5,47.42 63.54,47.42 58.22,42.1 U1.12
USART3_RX: length 28.5
  TOP w0.2: UART3.3 53,64.23 48.73,64.23 48.3,63.8 48.3,51.02 51.28,48.05 U1.22
USART3_TX: length 30.7
  TOP w0.2: U1.21 51.78,44.54 51.74,44.57 51.74,46.38 51.78,46.42 51.78,48.12 48.63,51.27 48.63,63.53 48.98,63.88 55.28,63.88 UART3.4
N03876: length 2.1
  TOP w0.2: R2.1 30.66,42.13 30.65,42.12 BOOT.2
N06551: length 1.4
  TOP w0.127: U3.4 32.98,61.16 32.98,61.17 R7.2
N07087: length 12
  TOP w0.6: U3.1 35.88,58.37 36.72,57.53 38.56,57.53 39.04,57.05 L1.2 39.04,52.26 39.64,51.66 D1.2
N07201: length 4.8
  TOP w0.2: R11.1 36.95,60.27 U3.3 35.58,61.1 35.6,61.12 R9.1 35.6,62.18 35.59,62.18 C16.1
N08056: length 4.4
  TOP w0.5: R5.1 43.12,62.1 43.12,62.1 C13.1 C12.1 43.08,64.05 U2.3
N10193: length 4.4
  TOP w0.2: Q1.1 79.42,28.93 arc(79.23,29.2) R13.2 78.79,29.16 78.24,28.61 arc(77.98,28.43) R17.1
N12066: length 1.9
  TOP w0.3: D10.1 40.19,61.15 40.2,61.15 R21.2
N13204: length 1.4
  TOP w0.2: 58.76,29.82 59.28,29.82 59.29,29.81 D11.1
N14590: length 3.7
  TOP w0.2: U4.20 arc(41.04,43.07) C24.1
N14597: length 3
  TOP w0.2: U4.10 40.23,35.35 40.61,34.98 C25.1
N17425: length 11.4
  TOP w0.5: M1.2 84.88,23.6 87.34,21.14 C17.2 88.09,19.58 88.09,18.91 D2.2
  TOP w0.6: Q1.3 82.37,24.63 82.37,24.43 M1.2
N17724: length 4.4
  TOP w0.2: R14.2 21.76,28.42 21.21,29.33 R18.1
  TOP w0.5: R14.2 21.22,27.13 21.22,26.88 Q2.1
N18193: length 4.6
  TOP w0.2: Q3.1 19.77,71.88 20.64,70.7 R15.2 21.39,70.7 22.09,71.36 R19.1
N18558: length 4.7
  TOP w0.2: R20.1 78.68,70.63 77.99,71.28 R16.2 78.78,72.82 78.78,73.12 Q4.1
N31030: length 8.1
  TOP w0.2: Y2.1 54.72,50.99 ; 54.72,50.99 54.72,53.57 55.25,54.1 55.86,54.1 56.62,54.86 56.62,55.51 ; 54.72,50.99 54.72,50.98 C33.1
N31048: length 5.5
  TOP w0.2: 57.12,55.51 57.12,54.86 58.38,53.6 Y2.3 59.31,52.69 59.31,52.7 C34.1
N31678: length 4.4
  TOP w0.2: U6.13 58.93,57.44 arc(59.8,57.61) L3.2 62.11,58.11 arc(62.18,58.12) L2.1
N31682: length 4.2
  TOP w0.2: L4.1 arc(61.37,56.49) L3.1 arc(59.31,56.84) U6.12
N31733: length 7.5
  TOP w0.127: 58.09,56.44 U6.11
  TOP w0.18: C32.1 C31.1 arc(62.98,54.58) L4.2 arc(60.71,55.27) 59.35,56.04 arc(58.73,56.34) U6.11
N32120: length 1.6
  TOP w0.2: L2.2 arc(63.03,59.71) C29.1
N32150: length 3.1
  TOP w0.2: 65.52,57.36 64.75,57.36 arc(64.75,58.53) 64.76,59.7
N42163: length 11.4
  TOP w0.5: D3.2 11.91,18.91 12.58,18.91 C18.2 13.81,20.14 14.55,20.14 16.9,22.49 M2.2 17.72,25.02 18.02,25.02 Q2.3
N42183: length 11.6
  TOP w0.5: D4.2 11.91,81.09 11.91,80.42 C19.2 13.14,79.19 13.14,78.3 15.13,76.1 M3.2 17.2,75.8 Q3.3
N42205: length 11.6
  TOP w0.5: Q4.3 81.98,74.98 82.28,74.98 M4.2 83.1,77.9 85.06,79.86 86.19,79.86 C20.2 87.42,81.09 88.09,81.09 D5.2
N44538: length 1.4
  TOP w0.2: D12.1 59.29,31.3 59.28,31.3 58.76,31.3
N45703: length 34.9
  TOP w0.2: D8.2 31.04,63.38 31.04,63.37 v1(30.6,62.93) ; D7.4 29.11,34.03 29.1,34.03 28.7,34.43 v1(28.69,34.43)
  BOTTOM w0.2: v1(30.6,62.93) 29.04,62.93 28.03,61.92 28.03,35.09 v1(28.69,34.43)
N45721: length 34.8
  TOP w0.2: D6.4 65.84,28.98 65.84,28.97 v1(65.4,28.53) ; D7.2 36.54,31.12 36.56,31.12 v1(37,30.68)
  BOTTOM w0.2: v1(37,30.68) 37,29.26 38.26,28 64.87,28 v1(65.4,28.53)
N45733: length 34.6
  TOP w0.2: v1(34.52,71.38) 34.08,70.94 34.07,70.94 D8.4 ; D9.2 63.52,68.81 63.52,68.82 v1(63.08,69.26)
  BOTTOM w0.2: v1(63.08,69.26) 63.08,70.32 61.45,71.95 35.09,71.95 v1(34.52,71.38)
N128503: length 3.2
  TOP w0.2: U6.19 55.62,60.78 C36.2
N3065515: length 2.4
  TOP w0.2: R28.1 57.37,60.27 57.12,60.02 U6.16

## Copper pours and planes (outline as drawn; the poured copper is in the pictures)
AGND1 on TOP: 9.75,1.84 2.04,2.04 1.84,9.75 25.3,35.72 35.72,25.3 ; 1 cut-out
AGND1 on TOP: 98.16,9.75 97.96,2.04 90.25,1.84 64.19,25.38 74.62,35.81 ; 2 cut-outs
AGND1 on BOTTOM, 2GND: 98.16,9.75 97.96,2.04 90.25,1.84 64.19,25.38 74.62,35.81
AGND1 on BOTTOM, 2GND: 9.75,1.84 2.04,2.04 1.84,9.75 25.3,35.72 35.72,25.3
AGND2 on TOP: 27.53,61.82 1.84,90.25 2.04,97.96 9.75,98.16 38.28,72.39 35.3,69.41 36.92,67.79 32.16,63.03 32.04,63.03 30.39,64.68 ; 1 cut-out
AGND2 on TOP: 72.58,61.94 69.77,64.75 69.52,64.75 67.77,63 63.05,67.72 64.7,69.38 61.71,72.38 90.25,98.16 97.96,97.96 98.16,90.25 ; 1 cut-out
AGND2 on BOTTOM: 1.84,90.25 2.04,97.96 9.75,98.16 38.28,72.39 35.3,69.41 36.92,67.79 32.16,63.03 32.04,63.03 30.39,64.68 27.53,61.82 ; 1 cut-out
AGND2 on BOTTOM, 2GND: 72.58,61.94 69.77,64.75 69.52,64.75 67.77,63 63.05,67.72 64.7,69.38 61.71,72.38 90.25,98.16 97.96,97.96 98.16,90.25
AGND2 on 2GND: 27.53,61.82 1.84,90.25 2.04,97.96 9.75,98.16 38.28,72.39 35.3,69.41 36.92,67.79 32.16,63.03 32.04,63.03 30.39,64.68
DGND on TOP: 36.17,25.71 25.71,36.17 27.9,38.6 27.9,45.58 27.95,45.58 27.99,45.62 32.26,45.62 32.26,44.39 37.33,44.39 37.33,47.23 45.23,47.23 45.41,47.41 45.41,47.65 45.38,47.68 45.38,72.1 61.14,72.1 63.86,69.38 62.53,68.05 62.48,68.05 62.3,67.87 62.3,67.63 66.07,63.86 48.78,63.86 48.78,48.64 72.1,48.64 72.1,38.6 74.21,36.26 63.74,25.79 61.4,27.9 38.6,27.9 ; 14 cut-outs
DGND on BOTTOM: 36.17,25.71 25.71,36.17 27.9,38.6 27.9,45.58 27.95,45.58 27.99,45.62 32.26,45.62 32.26,44.39 37.33,44.39 37.33,47.23 45.23,47.23 45.41,47.41 45.41,47.65 45.38,47.68 45.38,72.1 61.14,72.1 63.86,69.38 62.53,68.05 62.48,68.05 62.3,67.87 62.3,67.63 66.07,63.86 48.78,63.86 48.78,48.64 72.1,48.64 72.1,38.6 74.21,36.26 63.74,25.79 61.4,27.9 38.6,27.9 ; 7 cut-outs
DGND on 2GND: 36.17,25.71 25.71,36.17 27.9,38.6 27.9,45.58 27.95,45.58 27.99,45.62 32.26,45.62 32.26,44.39 37.33,44.39 37.33,47.23 45.23,47.23 45.41,47.41 45.41,47.65 45.38,47.68 45.38,72.1 61.14,72.1 63.86,69.38 62.53,68.05 62.48,68.05 62.3,67.87 62.3,67.63 66.07,63.86 48.78,63.86 48.78,48.64 72.1,48.64 72.1,38.6 74.21,36.26 63.74,25.79 61.4,27.9 38.6,27.9
GND on TOP: 32.86,44.99 32.86,46.22 27.9,46.22 27.9,61.35 30.39,63.84 31.8,62.43 32.4,62.43 37.59,67.62 37.59,67.97 37.41,68.15 37.4,68.15 36.14,69.41 38.83,72.1 44.78,72.1 44.78,47.83 37.22,47.83 37.2,47.85 36.96,47.85 36.73,47.62 36.73,44.99 ; 2 cut-outs
GND on BOTTOM, 2GND: 32.86,44.99 32.86,46.22 27.9,46.22 27.9,61.35 30.39,63.84 31.8,62.43 32.4,62.43 37.59,67.62 37.59,67.97 37.41,68.15 37.4,68.15 36.14,69.41 38.83,72.1 44.78,72.1 44.78,47.83 37.22,47.83 37.2,47.85 36.96,47.85 36.73,47.62 36.73,44.99
VBAT on 3POWER: 27.53,61.82 1.84,90.25 2.04,97.96 9.75,98.16 38.28,72.39 35.3,69.41 36.92,67.79 32.16,63.03 32.04,63.03 30.39,64.68
VBAT on 3POWER: 72.58,61.94 69.77,64.75 69.52,64.75 67.77,63 63.05,67.72 64.7,69.38 61.71,72.38 90.25,98.16 97.96,97.96 98.16,90.25
VBAT on 3POWER: 98.16,9.75 97.96,2.04 90.25,1.84 61.84,27.51 72.49,38.16
VBAT on 3POWER: 9.75,1.84 2.04,2.04 1.84,9.75 27.51,38.16 38.16,27.51
VCC3V3 on 3POWER: 38.61,27.9 27.9,38.61 27.9,61.35 30.39,63.84 31.8,62.43 32.4,62.43 37.59,67.62 37.59,67.97 37.41,68.15 37.4,68.15 36.14,69.41 38.83,72.1 61.14,72.1 63.86,69.38 62.53,68.05 62.48,68.05 62.3,67.87 62.3,67.63 66.07,63.86 48.78,63.86 48.78,48.64 72.1,48.64 72.1,38.61 61.42,27.93 61.14,27.93 61.11,27.9
Net_6 on TOP (solid shape): 71.09,52.45 71.09,51.25 69.09,51.25 69.09,52.45
RF3V3 on 3POWER: 49.38,49.24 49.38,63.26 66.67,63.26 67.54,62.39 68,62.39 69.64,64.03 72.18,61.49 72.1,61.4 72.1,49.24
RFGND on TOP: 49.38,49.24 49.38,63.26 66.67,63.26 67.54,62.39 68,62.39 69.64,64.03 72.18,61.49 72.1,61.4 72.1,49.24 ; 4 cut-outs
RFGND on BOTTOM: 69.64,64.03 72.18,61.49 72.1,61.4 72.1,49.24 49.38,49.24 49.38,63.26 66.67,63.26 67.54,62.39 68,62.39 ; 2 cut-outs
RFGND on 2GND: 49.38,49.24 49.38,63.26 66.67,63.26 67.54,62.39 68,62.39 69.64,64.03 72.18,61.49 72.1,61.4 72.1,49.24
N32150 on TOP (solid shape): 71.09,56.75 69.09,56.75 69.09,57.1 65.29,57.1 65.29,57.6 69.09,57.6 69.09,57.95 71.09,57.95

## Text on the board
Ref Des/Silkscreen Top: 3V3 | GND | RST | SDIO | CLK | 3v3 | RX | TX
